# Altium PCB PN532_final.PcbDoc
Units mm, origin at the board's own origin, x right, y up, seen from the top; angles counter-clockwise.
Board outline 117.09 x 51.05 mm, 2 copper layers (Top Layer, Bottom Layer), stack 0.57 mm thick; 54 components, 32 nets, 161 pads, 129 vias.
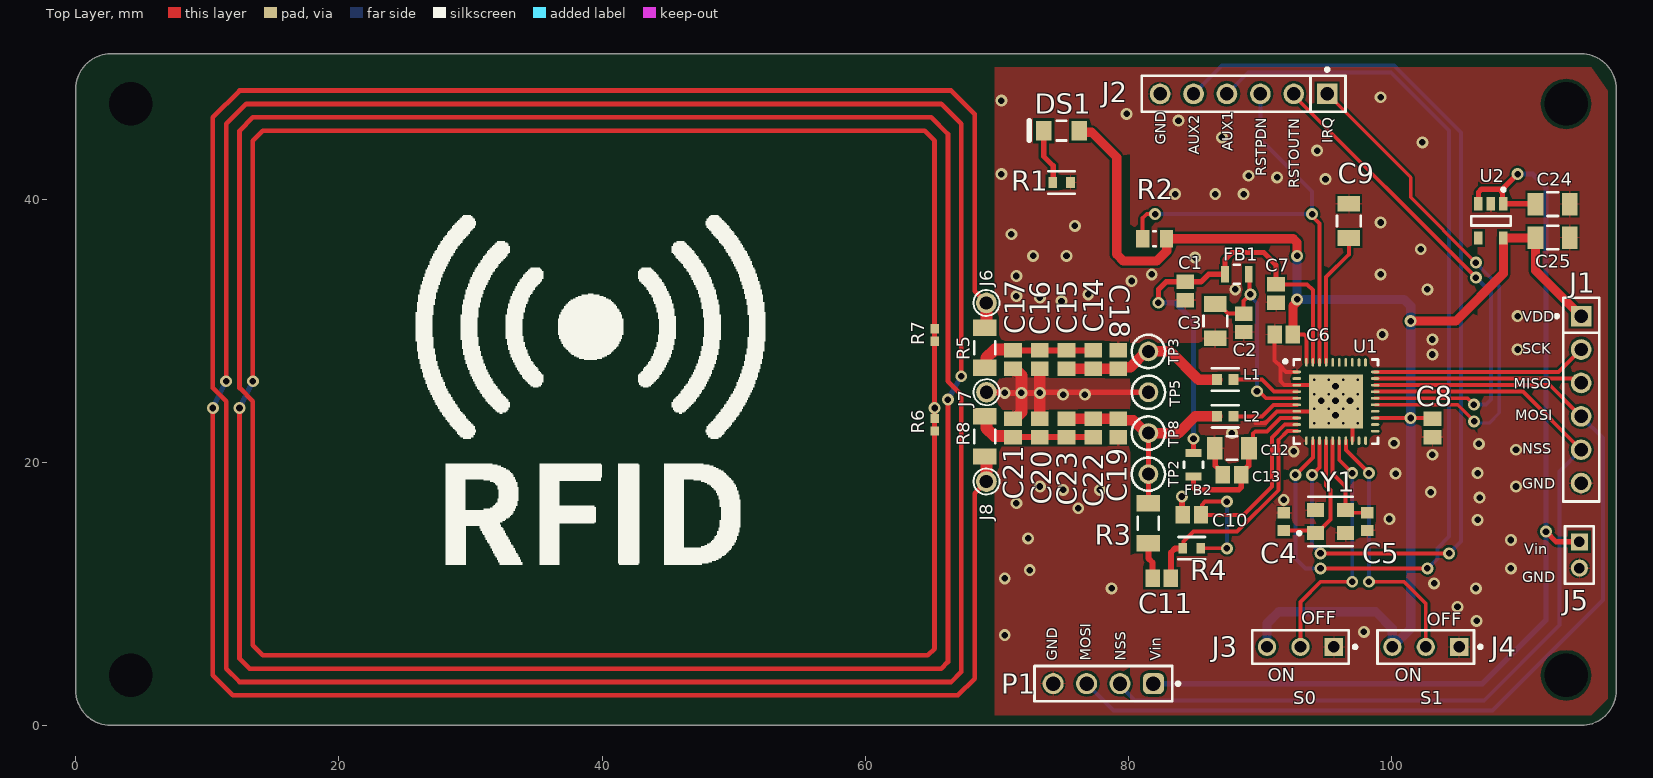
[diagram p0: Top Layer view]
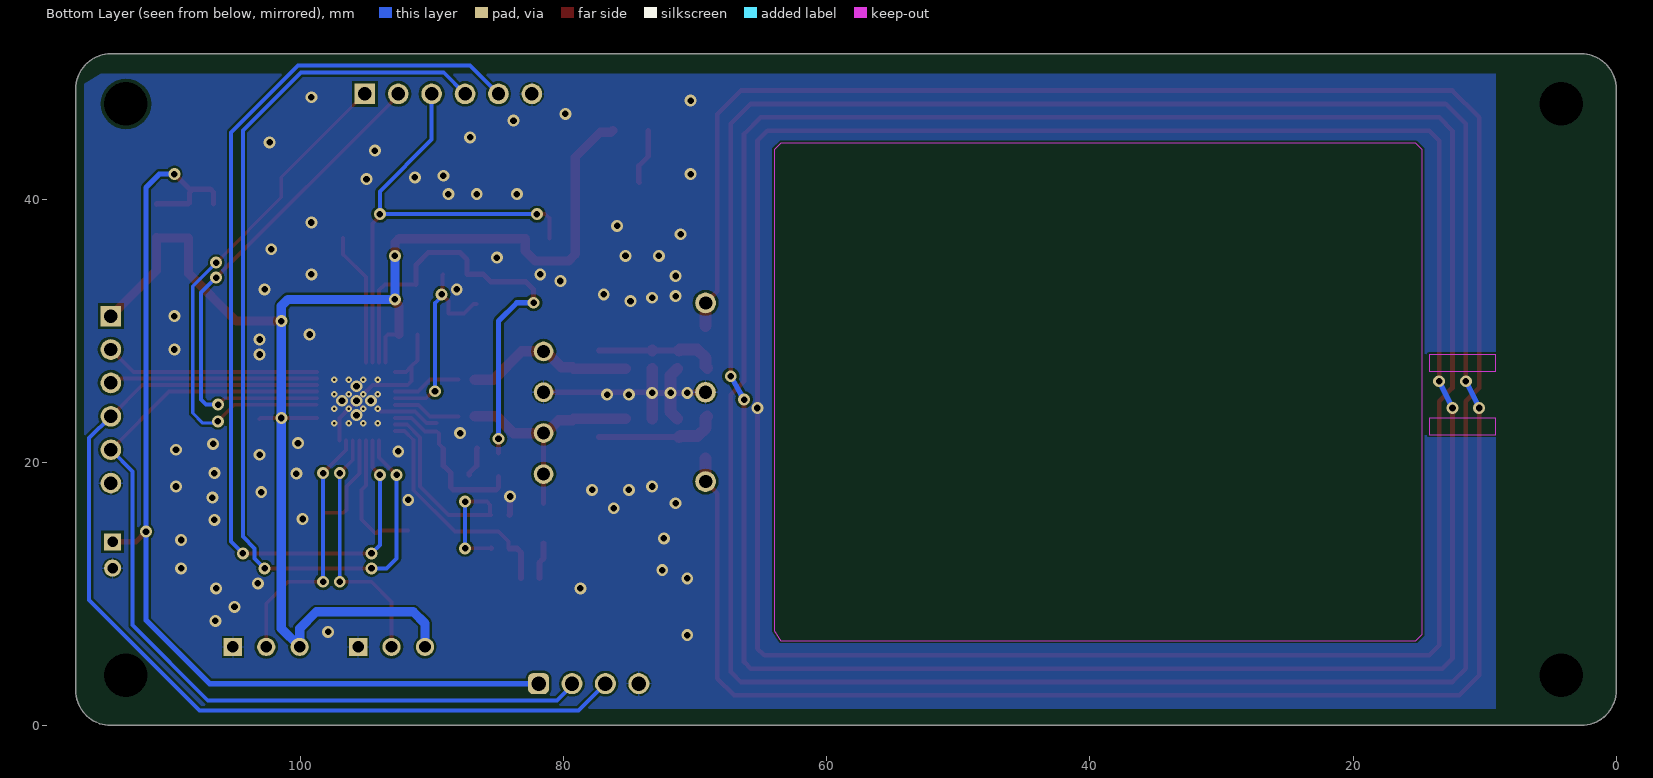
[diagram p1: Bottom Layer view, seen from below]

## Layer stack, top to bottom
Top Solder: solder mask 0.0127, Solder Resist, Dk 3.8
Top Layer: signal copper 0.035
Dielectric: core 0.5, FR-4, Dk 4.5
Bottom Layer: signal copper 0.035
Bottom Solder: solder mask 0.0127, Solder Resist, Dk 3.8

## Board outline
0,4.191 0,47.498 0,48.387 cw(c2.667,48.387) 2.667,51.054 3.556,51.054 114.427,51.054 cw(c114.427,48.387) 117.094,48.387 117.094,2.667 cw(c114.427,2.667) 114.427,0 2.667,0 cw(c2.667,2.667) 0,2.667

## Design rules (kind name [scope] priority, off if disabled: settings)
BoardOutlineClearance [All] p1: gap=0.2 ignorepadtopadclearanceinfootprint=FALSE
Clearance [All] p1: gap=0.19 ignorepadtopadclearanceinfootprint=TRUE except(0.25: Arc-Hole Track-Hole SMDPad-Hole THPad-Hole Via-Hole Fill-Hole Poly-Hole Region-Hole Text-Hole)
ComponentClearance [All] p1: gap=0.127 collisioncheckmode=3 verticalgap=0.127 showdistances=TRUE
DiffPairsRouting [All] p1: maxlimit=0.254 minlimit=0.127 mostfreqgap=0.127 toplayer_minwidth=0.127 toplayer_maxwidth=25.4 toplayer_prefwidth=0.127 bottomlayer_minwidth=0.127 bottomlayer_maxwidth=25.4 bottomlayer_prefwidth=0.127 maxuncoupledlength=12.7
Height [All] p1: minheight=0 maxheight=1816.048 prefheight=12.7
HoleSize [All] p1: absolutevalues=TRUE maxlimit=6.3 minlimit=0.3 maxpercent=80.000 minpercent=20.000
HoleToHoleClearance [All] p1: gap=0.25 allowstackedmicrovias=FALSE
MinimumAnnularRing [All] p1: minimumring=0.076
MinimumSolderMaskSliver [All] p1: minsoldermaskwidth=0
PlaneClearance [All] p1: clearance=0.127
PlaneConnect PlaneConnectPowerPads [InPadClass('PowerPads')] p1: planeconnectstyle=Direct reliefexpansion=0.508 reliefentries=4 reliefconductorwidth=0.254 reliefairgap=0.254
PlaneConnect [All] p2: pad.planeconnectstyle=Relief pad.reliefexpansion=0.3 pad.reliefentries=4 pad.reliefconductorwidth=0.127 pad.reliefairgap=0.127 via.planeconnectstyle=Direct via.reliefexpansion=0.3 via.reliefentries=4 via.reliefconductorwidth=0.127 via.reliefairgap=0.127
PolygonConnect PolygonConnectPowerPads [All vs (InPadClass('PowerPads'))] p1: connectstyle=Direct reliefconductorwidth=0.254 reliefentries=4 polygonreliefangle="90 Angle" airgapwidth=0.254
PolygonConnect [All] p2: thpad.connectstyle=Relief thpad.reliefconductorwidth=0.127 thpad.reliefentries=4 thpad.polygonreliefangle="90 Angle" thpad.airgapwidth=0.127 smdpad.connectstyle=Relief smdpad.reliefconductorwidth=0.127 smdpad.reliefentries=4 smdpad.polygonreliefangle="90 Angle" smdpad.airgapwidth=0.127 via.connectstyle=Direct via.reliefconductorwidth=0.127 via.reliefentries=4 via.polygonreliefangle="90 Angle" via.airgapwidth=0.127
RoutingVias [All] p1: holewidth=0.3 width=0.6 viastyle="Through Hole" minholewidth=0.3 minwidth=0.6 maxholewidth=0.6 maxwidth=6.6
SilkToSilkClearance [All] p1: silktosilkclearance=0
SilkToSolderMaskClearance [IsPad] p1: minsilkscreentomaskgap=0.127 clearancetoexposedcopper=TRUE
SolderMaskExpansion [All] p1: expansion=0.075 istentingtop=FALSE
SupplyNets "Schematic Supply Nets_2" [InNet('VDD')] p1: voltage=0.000
SupplyNets "Schematic Supply Nets_1" [InNet('Vin')] p2: voltage=0.000
SupplyNets "Schematic Supply Nets" [InNet('GND')] p3: voltage=0.000
UnRoutedNet [All] p1: checkbadconnections=TRUE
Width [All] p1: maxlimit=25.4 minlimit=0.127 preferedwidth=0.127 minimp=50.000000 maximp=50.000000 favimp=50.000000
19 further rules are at their usual default settings.

## Classes and differential pairs
component class U_Reader: C1 C2 C3 C4 C5 C6 C7 C8 C9 C10 C11 C12 C13 DS1 FB1 FB2 J1 J2 J3 J4 L1 L2 P1 R1 R2 R3 R4 TP2 U1 Y1
component class U_power: C24 C25 J5 U2
component class U_Antenna: C14 C15 C16 C17 C18 C19 C20 C21 C22 C23 J6 J7 J8 R5 R6 R7 R8 TP3 TP5 TP8

## Components (designator, comment, footprint, x,y, rotation, side; value= is the part's Value field where it differs from the comment)
C1 "0.1uF" CAPC2013X140X50LL20T25 84.332,33.02 r90 top
C2 "0.1uF" CAPC2013X140X50LL20T25 88.777,30.607 r90 top
C3 "10uF" FP-CC1206-0_3-1_45-IPC_C 86.618,30.734 r270 top
C4 "33pF" CAPC1608X90X35NL10T15 91.837,15.49 r270 top
C5 "33pF" CAPC1608X90X35NL10T15 98.187,15.49 r90 top
C6 "0.1uF" CAPC2013X140X50LL20T25 91.821,29.718 r0 top
C7 "0.1uF" CAPC2013X140X50LL20T25 91.242,32.837 r90 top
C8 "0.1uF" CAPC2013X140X50LL20T25 103.124,22.606 r90 top
C9 "10uF" FP-CC1206-0_3-1_45-IPC_C 96.774,38.354 r90 top
C10 "0.1uF" CAPC2013X140X50LL20T25 84.832,16.006 r0 top
C11 "1nF" CAPC2013X140X50LL20T25 82.55,11.192 r0 top
C12 "10uF" FP-CC1206-0_3-1_45-IPC_C 87.884,21.082 r180 top
C13 "0.1uF" CAPC2013X140X50LL20T25 87.884,19.05 r0 top
C14 "NC" CAPC2013X140X50LL20T25 77.335,27.813 r90 top
C15 "22pF" CAPC2013X140X50LL20T25 75.307,27.813 r90 top
C16 "100pF" CAPC2013X140X50LL20T25 73.279,27.813 r90 top
C17 "NC" CAPC2013X140X50LL20T25 71.251,27.809 r90 top
C18 "220pF" CAPC2013X140X50LL20T25 79.24,27.809 r270 top
C19 "220pF" CAPC2013X140X50LL20T25 79.24,22.61 r270 top
C20 "100pF" CAPC2013X140X50LL20T25 73.279,22.61 r90 top
C21 "NC" CAPC2013X140X50LL20T25 71.251,22.61 r90 top
C22 "NC" CAPC2013X140X50LL20T25 77.335,22.61 r90 top
C23 "22pF" CAPC2013X140X50LL20T25 75.307,22.61 r90 top
C24 "10uF" FP-CC1206-0_3-1_45-IPC_C 112.268,39.624 r0 top
C25 "10uF" FP-CC1206-0_3-1_45-IPC_C 112.268,37.084 r0 top
DS1 "SML-LX1206YC-TR" LUMX-SML-LX1206YC-TR_V 74.93,45.212 r180 top
FB1 "Ferrite" FP-BLM21-0_2-t0_85-e0_5-MFG 88.265,34.29 r0 top
FB2 "Ferrite" FP-BLM21-0_2-t0_85-e0_5-MFG 84.963,19.812 r270 top
J1 "22-28-4060" FP-22-28-4060-MFG 114.427,24.765 r270 top
J2 "22-28-4060" FP-22-28-4060-MFG 88.773,48.006 r180 top
J3 "87224-3" FP-87224-3-MFG 93.091,5.969 r180 top
J4 "87224-3" FP-87224-3-MFG 102.616,5.969 r180 top
J5 "M22-2510205" FP-M22-2510205-MFG 114.3,12.954 r270 top
J6 "TX1_PRE" FP-5000-MFG 69.223,32.113 r0 top
J7 "TGND" FP-5000-MFG 69.227,25.327 r0 top
J8 "TX2_PRE" FP-5000-MFG 69.223,18.541 r0 top
L1 "560nH" FP-LQM18FN_00-IPC_C 87.376,26.289 r180 top
L2 "560nH" FP-LQM18FN_00-IPC_C 87.376,23.495 r180 top
P1 "61300411121" 61300411121 78.105,3.175 r180 top
R1 "10Ohm" FP-RC0603-0_55-IPC_C 74.93,41.275 r180 top
R2 "10kOhm" RESC2013X60X35NL10T20 82,37 r0 top
R3 "1.69kOhm" RESC3116X65X40ML10T20 81.534,15.371 r90 top
R4 "1kOhm" FP-RC0603-0_55-IPC_C 84.832,13.474 r0 top
R5 "1.5Ohm" RESC3116X65X40ML10T20 69.096,28.706 r270 top
R6 "NC" RESC1005X40X25ML05T10 65.278,22.855 r270 top
R7 "NC" RESC1005X40X25ML05T10 65.278,29.674 r270 top
R8 "1.5Ohm" RESC3116X65X40ML10T20 69.096,21.967 r270 top
TP2 "RX" KSTN-5003 81.534,19.1 r0 top
TP3 "TX1_post" KSTN-5003 81.534,28.43 r0 top
TP5 "TGND" KSTN-5003 81.534,25.327 r0 top
TP8 "TX2_post" KSTN-5003 81.534,22.224 r0 top
U1 "PN5321A3HN/C106;55" NXP-HVQFN-40_L 95.79,24.62 r0 top
U2 "MIC5225-3.3YM5-TR" FP-SOT23-5LD-PL-1-MFG 107.569,38.354 r270 top
Y1 "27.12MHz" FP-ABM8-MFG 95.377,15.494 r0 top

## Footprints (in the part's own frame and the unit in brackets; to place one, negate y for a bottom-side part, rotate by r counter-clockwise, add the part's x,y. Pads: shape width x height; smd on the part's side, far side on the other; paste and mask are expansions set on the pad)
61300411121 [mm] "Pin Header, pitch 2.54 mm, THT, Vertical, single row, 4p"
  rrect50% 1.6x1.6 hole 1.1: 1(-3.81,0)
  round 1.6 hole 1.1: 2(-1.27,0) 3(1.27,0) 4(3.81,0)
  silkscreen extent -5.8,-1.35 5.23,1.35, body extent -5.08,-1.27 5.08,1.27, height 8.57
CAPC1608X90X35NL10T15 [mm] "Chip Capacitor, 2-Leads, Body 1.60x0.80mm, IPC Medium Density"
  rect 0.85x0.95 smd: 1(-0.675,0) 2(0.675,0)
  body extent -0.85,-0.45 0.85,0.45, height 0.9
CAPC2013X140X50LL20T25 [mm] "Chip Capacitor, 2-Leads, Body 2.00x1.25mm, IPC High Density"
  rect 1.1x1.35 smd: 1(-0.7,0) 2(0.7,0)
  body extent -1.1,-0.72 1.1,0.72, height 1.4
FP-22-28-4060-MFG [mm]
  rect 1.57x1.57 hole 1.02 paste-2539.97 mask+0: 1(-6.35,0)
  round 1.57 hole 1.02 paste-2539.97 mask+0: 2(-3.81,0) 3(-1.27,0) 4(1.27,0) 5(3.81,0) 6(6.35,0)
  silkscreen extent -7.75,-1.97 7.75,1.37, body extent -7.85,-1.47 7.85,1.47, height 0.25
FP-5000-MFG [mm]
  round 1.57 hole 1.02 paste-2539.97 mask+0: 1(0,0)
  silkscreen extent -0.99,-0.99 0.99,0.99, body extent -1.45,-1.45 1.45,1.45, height 0.25
FP-87224-3-MFG [mil]
  rect 54.69x54.69 hole 35 paste-99999 mask+0: 1(-100,0)
  round 54.69 hole 35 paste-99999 mask+0: 2(0,0) 3(100,0)
  silkscreen extent -168,-50 145,50, body extent -148,-54 148,54, height 10
FP-ABM8-MFG [mm]
  rect 1.3x1.05 smd paste+0 mask+0: 1(-1.15,-0.875) 2(1.15,-0.875) 3(1.15,0.875) 4(-1.15,0.875)
  silkscreen extent -2.5,-1.88 1.7,1.88, body extent -1.9,-1.5 1.9,1.5, height 0.25
FP-BLM21-0_2-t0_85-e0_5-MFG [mm]
  rect 0.6x1.25 smd paste+0 mask+0: 1(-0.9,0) 2(0.9,0)
  silkscreen extent -0.23,-0.72 0.23,0.72, body extent -1.3,-0.82 1.3,0.82, height 0.25
FP-CC1206-0_3-1_45-IPC_C [mm]
  rect 1.203x1.706 smd paste+0 mask+0: 1(-1.3,0) 2(1.3,0)
  silkscreen extent -0.4,-0.9 0.4,0.9, body extent -2,-1 2,1, height 0.25
FP-LQM18FN_00-IPC_C [mm]
  rect 0.758x0.812 smd paste+0 mask+0: 1(-0.627,0) 2(0.627,0)
  silkscreen extent -1.01,-0.85 1.01,0.85, body extent -1.11,-0.55 1.11,0.55, height 0.25
FP-M22-2510205-MFG [mm]
  rect 1.3x1.3 hole 0.8 paste-2539.97 mask+0: 1(-1,0)
  round 1.3 hole 0.8 paste-2539.97 mask+0: 2(1,0)
  silkscreen extent -2.17,-1.1 2.17,1.1, body extent -2.27,-1.2 2.27,1.2, height 0.25
FP-RC0603-0_55-IPC_C [mm]
  rect 0.659x0.812 smd paste+0 mask+0: 1(-0.677,0) 2(0.677,0)
  silkscreen extent -1.01,-0.85 1.01,0.85, body extent -1.11,-0.55 1.11,0.55, height 0.25
FP-SOT23-5LD-PL-1-MFG [mm]
  rect 1x0.66 smd paste+0 mask+0: 1(-1.3,0.95) 2(-1.3,0) 3(-1.3,-0.95) 4(1.3,-0.95) 5(1.3,0.95)
  silkscreen extent -2.5,-1.5 0.35,1.5, body extent -1.9,-1.6 1.9,1.6, height 0.25
KSTN-5003 [mm] "Test Point, Through Hole, Dia 2.54mm"
  round 1.5 hole 1: 1(0,0)
  silkscreen extent -1.27,-1.27 1.27,1.27, body extent -1.27,-1.27 1.27,1.27, height 4.57
LUMX-SML-LX1206YC-TR_V [mm] "SMD, 2-Leads, Body 3.2x1.5mm"
  rect 1.2x1.5 smd: 1(-1.35,0) 2(1.35,0)
  silkscreen extent -0.35,-0.75 2.45,0.75, body extent -1.6,-0.75 1.6,0.75, height 1.25
NXP-HVQFN-40_L [mm] "QFN, 40-Leads, Body 6.1x6.1mm, Pitch 0.5mm, Thermal Pad 4.1x4.1mm, IPC High Density"
  oval 0.65x0.2 smd: 1(-2.975,2.25) 2(-2.975,1.75) 3(-2.975,1.25) 4(-2.975,0.75) 5(-2.975,0.25) 6(-2.975,-0.25) 7(-2.975,-0.75) 8(-2.975,-1.25) 9(-2.975,-1.75) 10(-2.975,-2.25) 21(2.975,-2.25) 22(2.975,-1.75) 23(2.975,-1.25) 24(2.975,-0.75) 25(2.975,-0.25) 26(2.975,0.25) 27(2.975,0.75) 28(2.975,1.25) 29(2.975,1.75) 30(2.975,2.25)
  oval 0.2x0.65 smd: 11(-2.25,-2.975) 12(-1.75,-2.975) 13(-1.25,-2.975) 14(-0.75,-2.975) 15(-0.25,-2.975) 16(0.25,-2.975) 17(0.75,-2.975) 18(1.25,-2.975) 19(1.75,-2.975) 20(2.25,-2.975) 31(2.25,2.975) 32(1.75,2.975) 33(1.25,2.975) 34(0.75,2.975) 35(0.25,2.975) 36(-0.25,2.975) 37(-0.75,2.975) 38(-1.25,2.975) 39(-1.75,2.975) 40(-2.25,2.975)
  rect 4.1x4.1 smd: 41(0,0)
  silkscreen extent -3.97,-3.2 3.2,3.2, body extent -3.05,-3.05 3.05,3.05, height 1
RESC1005X40X25ML05T10 [mm] "Chip Resistor, 2-Leads, Body 1.00x0.50mm, IPC Low Density"
  rect 0.7x0.65 smd: 1(-0.475,0) 2(0.475,0)
  body extent -0.53,-0.27 0.53,0.28, height 0.4
RESC2013X60X35NL10T20 [mm] "Chip Resistor, 2-Leads, Body 2.1x1.35mm, IPC Medium Density"
  rect 1x1.35 smd: 1(-0.9,0) 2(0.9,0)
  silkscreen extent -0.1,-0.58 0.1,0.58, body extent -1.05,-0.68 1.05,0.67, height 0.6
RESC3116X65X40ML10T20 [mm] "Chip Resistor, 2-Leads, Body 3.10x1.60mm, IPC Low Density"
  rect 1.25x1.8 smd: 1(-1.525,0) 2(1.525,0)
  silkscreen extent -0.5,-0.8 0.5,0.8, body extent -1.6,-0.85 1.6,0.85, height 0.65

## Part data
C1 C2 C6 C7 C8 C10 C11 C13 C16: library part CMP-2007-04699-1, "08055C221KAT2A / 0805", Manufacturer="AVX Interconnect / Elco", Part Number=08055C221KAT2A
C3 C9 C12 C24 C25: library part CMP-2000-05436-2, "CAP CER 1000PF 2KV X7R 1206", Capacitance=1nF, Case Code (Imperial)=1206, Case Code (Metric)=3216, Dielectric=X7R, Insulation Resistance=10GR, Max Operating Temperature=125°C, Min Operating Temperature=-55°C, Package Quantity=1, Resistor Type=Ceramic, Tolerance=10%, Voltage=2kV, Case/Package=1206, Construction=Flat, Depth=1.6mm, Dissipation Factor=2.5%, Height=1.25mm, Lead Free="Lead Free", Length=3.2mm, Mount="Surface Mount", Number of Pins=2, Packaging="Tape and Reel", Radiation Hardening=No, RoHS Compliant=Yes, Series=CC, Termination=SMD/SMT, Thickness=0.057inch, Voltage Rating=2kV, Voltage Rating (DC)=2kV, Width=0.063inch
C4 C5: library part CMP-2006-02655-1, "0603", Manufacturer=Murata, Part Number=GRM1885C1H330GA01D
C14 C15 C17 C18 C19 C20 C21 C22 C23: library part CMP-2007-04699-1, "08055C221KAT2A", Manufacturer="AVX Interconnect / Elco", Part Number=08055C221KAT2A
DS1: library part CMP-2000-07124-1, "Yellow LED, Water Clear Len, 585 nm, 2.1 V, -40 to 85 degC, 2-Pin SMD, RoHS, Tape and Reel", Color=Yellow, Current - Test=20mA, Lens Color=Colorless, Manufacturer=Lumex, Millicandela Rating=6mcd, Package / Case=1206(3216Metric), Package Description="2-Pin Surface Mount Device, Body 3.2 x 1.5 mm", Standard Package=3,000, Supplier Device Package=1206, Voltage - Forward (Vf) (Typ)=2.1V, Catalog Drawings=SML-LX1206SeriesTopSML-LX1206SeriesSideSML-LX1206SeriesBottomSML-LX1206SeriesFootprint, Category=Optoelectronics, Datasheet URL=http://www.lumex.com/content/files/ProductAttachment/SML-LX1206YC-TR.pdf, Datasheet Version="Rev. K, 08/2012", Family=LEDIndication-Discrete, Features=-, Height (Max)=1.10mm, Lens Style/Size=RectanglewithFlatTop, Lens Transparency=Clear, Manufacturer URL=http://www.lumexinstruments.com/, Mounting Technology=SurfaceMount, Mounting Type=SurfaceMount, Online Catalog=SML-LX1206RectanglewithFlatTop1206PackageLEDs, Other Names=67-1358-2LU60357TRSMLLX1206YCTR, Package Reference=SML-LX1206YC-TR, Packaging=Tape&Reel(TR), Product Training Modules=LEDsBenefitsofCustomLEDandLCDTechnology, RoHS Information=RoHSCertofCompliance, Series=-, Size / Dimension=3.20mmLx1.60mmW, Viewing Angle=160°, Wavelength - Dominant=-, Wavelength - Peak=585nm
FB1 FB2: library part CMP-0686-00645-3, "Chip Ferrite Bead, 0805, 470Ω @ 100MHz, 0.18Ω, 25%, 700mA / BLM21AG471SN1D", Case Code (Imperial)=0805, Case Code (Metric)=2012, Current Rating=700mA, DC Current=200mA, DC Resistance (DCR)=190mR, DC Resistance-Max=190MR, Frequency=100MHz, Max Operating Temperature=125°C, Min Operating Temperature=-55°C, Package Quantity=1, Tolerance=25%, Case/Package=0805, Core Material=Ferrite, Depth=1.45mm, Height=0.85mm, Impedance=470R, Lead Free="Lead Free", Length=2mm, Material=Steel, Max Current Rating=700mA, Max DC Current=200mA, Number of Circuits=1, Number of Lines=1, Number of Pins=2, Packaging="Tape and Reel", Radiation Hardening=No, REACH SVHC="No SVHC", RoHS Compliant=Yes, Series=BLM21A, Shielding=Unshielded, Termination=SMD/SMT, Test Frequency=100MHz, Width=1.25mm
J1 J2: library part CMP-04776-000763-1, "CONN HEADER VERT 6POS 2.54MM", Color=Black, Contact Resistance=20mR, Current Rating=4A, Max Operating Temperature=75°C, Max Voltage Rating (AC)=250V, Max Voltage Rating (DC)=250.25kV, Min Operating Temperature=0°C, Package Quantity=1, Connector Type="Male Pin", Contact Material=Brass, Contact Mating Length=0.24inch, Contact Plating=Tin, Contact Type="Male Pin", Depth=2.49mm, Gender=Male, Housing Color=Black, Housing Material=Thermoplastic, Length=15.24mm, Mount="Through Hole", Number of Contacts=6, Number of Positions=6, Number of Rows=1, Orientation=Straight, Packaging=Bulk, Pitch=2.54mm, RoHS Compliant=Yes, Series="KK® 42375", Termination=Solder, Voltage Rating=250V
J3 J4: library part CMP-2000-05697-2, "CONN HEADER VERT 3POS 2.54MM", Color=Black, Contact Current Rating=3A, Flammability Rating="UL94 V-0", High Temperature Housing=No, Max Operating Temperature=105°C, Min Operating Temperature=-65°C, Package Quantity=520, Approvals=CSA, Board Standoff="No (Without)", Connector Type=Plug, Contact Gender=Male, Contact Material=Bronze, Contact Mating Length=8.08mm, Contact Plating=Gold, Contact Post Length=0.125inch, Contact Protection="No (Without)", Contact Shape=Square, Contact Type="Male Pin", Current Rating=3A, Depth=2.54mm, ELV=Compliant, Gasket="No (Without)", High Speed Serial Data Connector=No, Housing Color=Black, Housing Material=Thermoplastic, Keyed=No, Lead Free="Lead Free", Length=7.21mm, Mating Alignment="No (Without)", Mating Connector Lock="No (Without)", Mount="Through Hole", Number of Contacts=3, Number of Positions=3, Number of Rows=1, Orientation=Straight, Packaging=Carton, PCB Mount Retention=Without, PCB Mounting Orientation=Vertical, PCB Thickness=1.397mm, Pitch=2.54mm, Radiation Hardening=No, RoHS Compliant=Yes, Row Spacing=2.54mm, Selectively Loaded="No (Without)", Series="AMPMODU MOD II", Stabilizers="No (Without)", Strain Relief="No (Without)", Termination="Through Hole"
J5: library part CMP-15831-000005-1, "CONN HEADER VERT 2POS 2MM", Current Rating=2A, Manufacturer=Harwin, Package=0, Temperature="-40°C to +105°C", Temperature Range High=+105°C, Temperature Range Low=-40°C, Automotive=No, Category=Conn, ComponentLink2Description=Datasheet, ComponentLink2URL=https://cdn.harwin.com/pdfs/C018XX_M22_Series_Connectors.pdf, Conn Gender=Male, Conn Orientation=Vertical, Contact Material=Gold,Nickel, Device Class L1=Connectors, Device Class L2="Headers and Wire Housings", Device Class L3=unset, Digikey Description="CONN HEADER VERT 2POS 2MM", Footprint Url=https://cdn.harwin.com/pdfs/M22-251.pdf, Height=5.45mm, Lead Free=Yes, Manufacturer Part Number=M22-2510205, Mouser Description="Headers & Wire Housings 2 PIN SIL VERTICAL GOLD PIN HEADER", Number of Contacts=2, Number of Rows=1, Octopart=https://octopart.com/m22-2510205-harwin-2538221, Pitch=2mm, RoHS=TRUE
J6 J7 J8: library part CMP-19636-000027-1, "PC TEST POINT MINIATURE RED", Color=Red, Flammability Rating="UL94 V-0", Package Quantity=100, Body Material=Bronze, Contact Material=Bronze, Contact Plating=Tin, Height=0.3inch, Hole Diameter=1.6mm, Housing Color=Red, Inside Diameter=1.27mm, Insulation=Insulated, Lead Free="Lead Free", Length=7.62mm, Material=Nylon, Mount=PCB, Number of Contacts=1, Number of Ports=1, Orientation=Straight, Outside Diameter=2.54mm, Packaging=Bulk, Plating=Silver, REACH SVHC="No SVHC", RoHS Compliant=Yes, Series=THM
L1 L2: library part CMP-06042-016407-1, "FIXED IND 10UH 50MA 900 MOHM SMD", Case Code (Imperial)=0603, Case Code (Metric)=1608, Current Rating=50mA, DC Resistance (DCR)=1.17R, Inductance=10uH, Max Operating Temperature=125°C, Min Operating Temperature=-55°C, Package Quantity=4000, Self Resonant Frequency=30MHz, Test Frequency=1MHz, Tolerance=20%, Case/Package=0603, Core Material=Ferrite, DC Current=50mA, Depth=0.9mm, Height=0.9mm, Height - Seated (Max)=0.035inch, Lead Free="Lead Free", Length=0.063inch, Max DC Current=50mA, Military Standard=Not, Mount="Surface Mount", Packaging="Tape and Reel", Radiation Hardening=No, RoHS Compliant=Yes, Saturation Current=50mA, Series=LQM18F, Shielding=Shielded, Termination=SMD/SMT, Width=0.031inch
P1: library part CMP-1502-01064-3, Color=Black, Contact Resistance=20mΩ, Current Rating=3A, Max Operating Temperature=105°C, Min Operating Temperature=-40°C, Operating Supply Voltage=250V, Connector Type="Male Pin", Contact Material=Copper, Contact Mating Length=5.9944mm, Contact Plating=Gold, Gender=Male, Height=8.89mm, Lead Free="Lead Free", Lead Pitch=2.54mm, Mount="Through Hole", NexarPartId=32855522, Number of Contacts=4, Number of Pins=4, Number of Positions=4, Number of Rows=1, Orientation=Vertical, Packaging=Bulk, Pitch=2.54mm, REACH SVHC=Unknown, RoHS=Compliant, Termination=Solder, Voltage Rating=250V
R1 R4: library part CMP-2100-03664-2, "RES 10K OHM 1% 1/10W 0603", Case Code (Imperial)=0603, Case Code (Metric)=1608, Max Operating Temperature=155°C, Max Power Dissipation=100mW, Min Operating Temperature=-55°C, Resistance=10kR, Resistance Tolerance=1%, Resistor Type="Thick Film", Temperature Coefficient=100ppm/°C, Voltage Rating=75V, Voltage Rating (DC)=50V, Case/Package=0603, Construction=Rectangular, Depth=0.8mm, Features="Moisture Resistant", Height=0.45mm, Lead Free="Lead Free", Lead Pitch=0.3mm, Length=1.6mm, Military Standard=Not, Number of Pins=2, Number of Terminations=2, Packaging="Tape and Reel", Power Rating=100mW, RoHS Compliant=Yes, Series=RC, Size Code=0603, Termination=SMD/SMT, Tolerance=1%, Weight=7.1E-05oz, Width=0.8mm
R2: library part CMP-1659-00013-4, "Chip Resistor, 10 KOhm, +/- 1%, 0.125 W, -55 to 155 degC, 0805 (2012 Metric), RoHS, Tape and Reel", Manufacturer=Yageo, Max Operating Temperature="155 degC", Min Operating Temperature="-55 degC", Package Quantity=5000, Voltage Rating="150 V", ComponentLink1Description="Manufacturer URL", ComponentLink1URL=http://www.yageo.com/, ComponentLink2Description=Datasheet, ComponentLink2URL=http://www.yageo.com/documents/recent/PYu-RC_Group_51_RoHS_L_04.pdf, DatasheetVersion="Rev. 4, 02/2016", Height="0.5 mm", Length="2 mm", Mount="Surface Mount", Mounting Technology="Surface Mount", PackageDescription="2-Pin Surface Mounted Device, Body 2 x 1.25 mm", PackageReference=0805, Packaging="Tape and Reel", Pins=2, REACH SVHC="No SVHC", RoHSCompliant=true
R3 R5 R8: library part CMP-2100-03677-1, "Chip Resistor, 10 Ohm, +/- 1%, 0.25 W, -55 to 155 degC, 1206 (3216 Metric), RoHS, Tape and Reel", Case Code (Imperial)=1206, Case Code (Metric)=3216, Manufacturer=Yageo, Max Operating Temperature=155degC, Max Power Dissipation=250mW, Min Operating Temperature=-55degC, Package Description="2-Pin Surface Mount Device, Body 3.1 x 1.6 mm", Package Quantity=1, Package Reference=1206.0, Resistance=10Ohm, Temperature Coefficient=200ppm/degreesC, Tolerance=1%, Voltage Rating=200V, Case/Package=1206, Composition=ThickFilm, Datasheet URL=http://www.yageo.com/NewPortal/yageodocoutput?fileName=/pdf/R-Chip/PYu-RC_Group_51_RoHS_L_5.pdf, Datasheet Version="Rev. 5, 10/2016", Depth=1.6mm, Height=0.026inch, Lead Free=LeadFree, Length=3.1mm, Manufacturer URL=http://www.yageo.com/, Military Standard=Not, Number of Pins=2, Number of Terminations=2, Packaging=TapeandReel, Power Rating=250mW, REACH SVHC=Unknown, RoHSCompliant=true, Termination=SMD/SMT, Voltage Rating (DC)=200V, Width=0.063inch
R6 R7: library part CMP-2002-07344-1, Manufacturer="Yageo / Phycomp", Part Number=RC0402FR-07100RL
TP2 TP3 TP5 TP8: library part CMP-1672-00009-1, "Test Point, Orange, 1-Pin THD, RoHS", Forward Current="3 A", Forward Voltage="1.08 V", Max Operating Temperature="150 degC", Max Surge Current="80 A", Min Operating Temperature="-65 degC", Package Quantity=500, Peak Reverse Current="600 uA", ComponentLink1Description="Manufacturer URL", ComponentLink1URL=http://www.keyelco.com/, ComponentLink2Description=Datasheet, ComponentLink2URL=http://keyelco.com/userAssets/file/M65p56.pdf, DatasheetVersion=Jun-15, Diameter="5.3 mm", Height="0.25 inch", Length="9.5 mm", Mount="Through Hole", PackageDescription="1-Pin Through Hole Device, Dia 2.54 mm", PackageReference=5003, Packaging=Bulk, Pins=2, Radiation Hardening=No, REACH SVHC="No SVHC", RoHSCompliant=true, Weight="0.01 lb", Width="0.25 inch"
U1: library part CMP-2000-05282-1, "NFC Controller, 13.56 MHz, -30 to 85 degC, 40-Pin HVQFN (SOT618-1), RoHS, Tray", Manufacturer="NXP Semiconductors", Maximum Operating Temperature=+85C, Minimum Operating Temperature=-25C, Operating Frequency=13.56MHz, Package / Case=QFN-40, Supply Current=12uA, Supply Voltage - Max=5.5V, Supply Voltage - Min=2.7V, Brand=NXPSemiconductors, Datasheet URL=https://datasheet.ciiva.com/1172/1391932-1172875.pdf, Datasheet Version="Rev. 1.2, 03/2011", Factory Pack Quantity=490, Manufacturer URL=http://www.nxp.com/, Mounting Style=SMD/SMT, Packaging=Tray, Product Category=RFWirelessMisc, RoHS=Details, Type=NearFieldTransmissionModule,Read/Write
U2: library part CMP-06324-000013-1, "IC REG LINEAR 3.3V 150MA SOT23-5", Dropout Voltage=310mV, Manufacturer="Microchip Technology", Max Junction Temp=+125°C, Max Supply Voltage=16V, Min Supply Voltage=2.3V, Nominal Supply Current=29-3000uA, Output Current=150mA, Output Voltage=3.3V, Package=SOT23-5LD-PL-1, Temperature="-40°C to +125°C", Temperature Range Low=-40°C, Accuracy Percentage=1%, Automotive=No, Category=IC, ComponentLink2Description=Datasheet, ComponentLink2URL=http://ww1.microchip.com/downloads/en/DeviceDoc/mic5225.pdf, Device Class L1="Integrated Circuits (ICs)", Device Class L2="Power Management ICs", Device Class L3="Voltage Regulators - Linear", Digikey Description="IC REG LINEAR 3.3V 150MA SOT23-5", Height=1.45mm, Lead Free=Yes, Manufacturer Part Number=MIC5225-3.3YM5-TR, Mouser Description="LDO Voltage Regulators High Vin, Low Iq Regulator (Lead Free)", Number Of Outputs=1, Octopart=https://octopart.com/mic5225-3.3ym5-tr-microchip-66802280, Output Type=Fixed, RoHS=TRUE, Standoff Height=0mm, Temperature Range High=+125°C
Y1: library part CMP-27762-000994-1, "Crystal 27.12MHz ±30ppm 18pF SMD-4 3.2mm x 2.5mm / ABM8-27.120MHZ-B4-T", Capacitance=1.8E-11F, Case/Package=SMD/SMT, ESR (Equivalent Series Resistance)=50R, Frequency Stability=50ppm, Frequency Tolerance=30ppm, Load Capacitance=18pF, Max Operating Temperature=70°C, Min Operating Temperature=-20°C, Frequency=27.12MHz, Height=0.031inch, Lead Free="Lead Free", Length=0.126inch, Mount="Surface Mount", Packaging="Tape and Reel", RoHS Compliant=Yes, Width=0.098inch

## Free pads (board coordinates)
  round 0 hole 3.3 unplated: 4(4.191,3.81) 4(4.191,47.244) 4(113.284,3.81) 4(113.284,47.244)

## Via types
v1: diameter 0.907/0.907 (per signal layer), hole 0.5, Top Layer to Bottom Layer, 113 vias
v2: diameter 0.5, hole 0.2, Top Layer to Bottom Layer, 16 vias

## Nets (pads, with @x,y where several pads share a name; then routed paths per layer and width w, separated by ;. In a path a pad name is that pad's centre, name@x,y a point inside that pad or via, vN(x,y) a via of type N, cw(c..) or ccw(c..) an arc to the next point about the centre after c; other vN are vias at no path point)
AUX1: J2.4 U1.12 | length 73.2
  Top Layer w0.3: v1(92.71,19.05) 94.04,20.38 U1.12 ; v1(94.615,11.938) v1(102.743,11.938)
  Bottom Layer w0.3: J2.4 89.122,49.625 99.979,49.625 104.394,45.21 104.394,14.351 103.505,13.462 103.505,12.7 v1(102.743,11.938) ; v1(92.71,19.05) 92.71,12.7 93.472,11.938 v1(94.615,11.938)
AUX2: J2.5 U1.13 | length 74.5
  Top Layer w0.3: v1(93.98,19.05) 94.54,19.61 U1.13 ; v1(94.615,13.081) v1(104.394,13.081)
  Bottom Layer w0.3: J2.5 87.122,50.165 100.203,50.165 105.283,45.085 105.283,14.224 105.283,13.97 v1(104.394,13.081) ; v1(93.98,19.05) 93.98,13.723 94.615,13.088 v1(94.615,13.081)
AVDD: C12.1 C13.2 FB2.2 U1.8 | length 12.9
  Top Layer w0.3: C13.2 C13.2@88.584,19.175 ; C12.1@89.154,21.052 C12.1 89.486,21.384 89.486,22.176 89.662,22.352 90.551,22.352 91.569,23.37 U1.8
  Top Layer w0.4: FB2.2 84.963,18.083 85.139,17.907 88.392,17.907 88.584,18.099 C13.2 ; C13.2@88.584,19.175 89.154,19.745 C12.1@89.154,21.052
GND: C1.1 C2.1 C3.2 C4.1 C5.1 C6.1 C7.1 C8.1 C9.2 C10.1 C12.2 C13.1 C16.1 C17.1 C18.1 C19.2 C20.2 C21.2 C24.2 C25.2 J1.6 J2.6 J3.1 J4.1 J5.2 J7.1 P1.4 R1.1 R6.1 R7.2 TP5.1 U1.1 U1.3 U1.7 U1.11 U1.18 U1.41 U2.2 Y1.2 Y1.4 | length 51.3
  Top Layer w0.3: 89.662,22.987 90.424,22.987 91.307,23.87 U1.7 U1.41@93.94,23.87 ; C6.1 91.121,27.751 91.562,27.31 ; U1.1 92.002,26.87 91.562,27.31 ; U1.41@94.54,25.87 U1.3 91.859,25.87 91.562,26.167 91.562,27.31 ; v2(95.24,24.07) U1.41 ; U1.18 U1.41@97.04,23.37
  Top Layer w0.356: 65.278,22.38 R6.1 v1(65.278,24.13) R7.2 65.278,30.149 ; U1.41@93.94,23.87 v2(94.14,24.07) ; U1.41@94.54,25.87 v2(95.24,25.17) U1.41 v2(96.34,24.07) U1.41@97.04,23.37
  Top Layer w0.4: C12.2 86.614,21.052 86.614,19.745 87.184,19.175 C13.1
  Top Layer w0.45: J7.1 69.254,25.3 70.585,25.3 v1(70.612,25.273) v1(71.882,25.273) v1(73.279,25.273) ; C21.2 C21.2@71.376,23.31 ; C17.1 C17.1@71.376,27.109 ; v1@73.279,25.327 TP5.1 ; v1(84.074,17.399) 84.103,17.37 84.103,16.035 C10.1
  Top Layer w0.9: C21.2@71.376,23.31 71.882,23.816 v1(71.882,25.273) 71.882,26.603 C17.1@71.376,27.109 ; C20.2 73.279,25.327 C16.1
  other v1: 70.612,6.858 97.917,7.112 106.487,7.953 105.029,9.017 78.74,10.414 106.426,10.414 103.251,10.795 70.612,11.176 72.517,11.811 109.093,11.938 109.093,14.097 72.39,14.224 106.553,15.621 99.855,15.69 76.2,16.51 71.501,16.891 91.821,17.145 106.71,17.312 102.997,17.739 75.057,17.907 77.851,17.907 73.279,18.161 109.474,18.161 100.33,19.136 106.553,19.177 103.124,20.574 92.583,20.828 109.474,20.955 106.66,21.401 100.203,21.463 87.884,22.225 95.758,23.581 94.658,24.681 95.758,24.681 96.858,24.681 75.057,25.146 76.708,25.146 95.758,25.781 103.124,28.194 109.601,28.575 103.124,29.337 99.314,29.718 109.601,31.115 74.93,32.258 73.279,32.512 71.501,32.635 76.962,32.762 88.138,33.147 102.743,33.147 80.264,33.782 71.501,34.163 81.788,34.29 99.187,34.29 85.09,35.56 72.771,35.687 75.311,35.687 102.235,36.195 71.12,37.338 75.946,37.973 99.187,38.227 83.566,40.386 86.614,40.386 88.773,40.386 94.996,41.529 91.313,41.656 89.154,41.783 70.358,41.91 94.361,43.688 102.362,44.323 87.122,44.704 83.82,45.974 79.883,46.482 70.358,47.498 99.187,47.752
  other v2: 94.14,22.97 95.24,22.97 96.34,22.97 97.44,22.97 97.44,24.07 94.14,25.17 96.34,25.17 97.44,25.17 94.14,26.27 95.24,26.27 96.34,26.27 97.44,26.27
IRQ: J2.1 U1.25 | length 40
  Top Layer w0.25: J2.1 101.473,41.656 101.473,40.132 v1(106.426,35.179) ; U1.25 105.043,24.37 v1(106.299,23.114)
  Bottom Layer w0.25: v1(106.299,23.114) 106.425,22.988 107.102,22.988 107.104,22.987 107.442,22.987 108.204,23.749 108.204,33.401 v1(106.426,35.179)
MISO: J1.3 U1.29 | length 15.8
  Top Layer w0.3: U1.29 113.748,26.37 114.083,26.035 J1.3
MOSI: J1.4 P1.3 U1.28 | length 74.9
  Top Layer w0.3: U1.28 112.032,25.87 112.042,25.88 J1.4
  Bottom Layer w0.3: P1.3 78.867,1.143 107.696,1.143 116.078,9.525 116.078,21.844 J1.4
NetC4_2: C4.2 U1.14 Y1.1 | length 10.2
  Top Layer w0.3: C4.2 94.031,14.815 Y1.1 94.352,14.619 95.377,15.644 95.377,17.907 95.04,18.244 U1.14
NetC5_2: C5.2 U1.15 Y1.3 | length 7.4
  Top Layer w0.3: U1.15 95.54,19.141 96.527,18.154 Y1.3 96.731,16.165 C5.2
NetC9_1: C9.1 U1.37 | length 10.2
  Top Layer w0.3: U1.37 95.04,34.08 96.774,35.814 C9.1
NetC11_1: C11.1 R3.1 | length 2.8
  Top Layer w0.45: R3.1 81.534,12.7 81.85,12.384 C11.1
NetC14_1: C14.1 C15.1 C18.2 L1.2 TP3.1 | length 12.9
  Top Layer w0.8: C15.1 C14.1 77.337,27.111 79.238,27.111 C18.2 79.34,27.209 80.151,27.209 81.372,28.43 TP3.1 83.203,28.43 85.344,26.289 L1.2
NetC14_2: C14.2 C15.2 C16.2 C17.2 R5.2 | length 9.2
  Top Layer w0.45: C17.2@71.253,28.511 C16.2@73.277,28.511 ; C16.2 C15.2 C14.2
  Top Layer w0.9: R5.2 69.215,27.3 69.215,27.94 69.85,28.575 71.185,28.575 C17.2 C17.2@71.253,28.511 ; C16.2@73.277,28.511 C16.2
NetC19_1: C19.1 C22.2 C23.2 L2.2 R3.2 TP2.1 TP8.1 | length 17.7
  Top Layer w0.4: R3.2 TP2.1 TP8.1
  Top Layer w0.8: C23.2 C22.2 C19.1 79.34,23.21 80.386,23.21 81.372,22.224 TP8.1 83.819,22.224 85.09,23.495 L2.2
NetC20_1: C20.1 C21.1 C22.1 C23.1 R8.1 | length 9.3
  Top Layer w0.45: C21.1 C20.1 C23.1 C22.1
  Top Layer w0.9: R8.1 69.215,23.373 69.215,22.606 69.811,22.01 71.151,22.01 C21.1
NetDS1_2: DS1.2 R1.2 | length 4.3
  Top Layer w0.4: DS1.2 73.58,43.26 74.295,42.545 74.295,41.317 R1.2
NetJ6_1: J6.1 R5.1 R6.2 | length 380.6
  Top Layer w0.356: 65.278,23.33 R6.2 65.278,5.842 64.77,5.334 14.224,5.334 13.462,6.096 13.462,24.638 12.446,25.654 12.446,45.212 13.462,46.228 65.024,46.228 66.294,44.958 66.294,26.162 67.31,25.146 67.31,4.064 66.548,3.302 12.446,3.302 11.43,4.318 11.43,24.638 10.414,25.654 10.414,46.228 12.446,48.26 66.548,48.26 68.334,46.474 68.334,33.002 J6.1 ; R5.1 R5.1@69.223,30.358
  Top Layer w0.9: R5.1@69.223,30.358 J6.1
NetJ8_1: J8.1 R7.1 R8.2 | length 378.5
  Top Layer w0.356: v1(10.414,24.13) 10.414,3.81 11.938,2.286 67.056,2.286 68.334,3.564 68.334,17.652 J8.1 ; v1(11.43,26.162) 11.43,45.72 12.954,47.244 65.786,47.244 67.31,45.72 v1(67.31,26.543) ; v1(12.446,24.13) 12.446,5.08 13.208,4.318 65.786,4.318 66.294,4.826 v1(66.294,24.765) ; v1(13.462,26.162) 13.462,44.45 14.224,45.212 64.516,45.212 65.278,44.45 R7.1 65.278,29.199 ; R8.2 R8.2@69.223,20.315
  Top Layer w0.9: J8.1 R8.2@69.223,20.315
  Bottom Layer w0.406: v1(10.414,24.13) v1(11.43,26.162) ; v1(12.446,24.13) v1(13.462,26.162) ; v1(66.294,24.765) v1(67.31,26.543)
NetL1_1: L1.1 U1.4 | length 5.2
  Top Layer w0.3: L1.1 90.17,26.289 91.089,25.37 U1.4
NetL2_1: L2.1 U1.6 | length 5.2
  Top Layer w0.3: L2.1 90.17,23.495 91.045,24.37 U1.6
NSS: J1.5 P1.2 U1.27 | length 67.9
  Top Layer w0.3: U1.27 105.114,25.37 105.124,25.38 110.002,25.38 J1.5
  Bottom Layer w0.3: P1.2 79.375,3.048 80.518,1.905 107.061,1.905 112.776,7.62 112.776,19.304 J1.5
RSTOUTN: J2.2 U1.26 | length 38.6
  Top Layer w0.3: J2.2 92.583,47.879 v1(106.426,34.036) ; U1.26 105.791,24.87 v1(106.277,24.384)
  Bottom Layer w0.3: v1(106.277,24.384) 107.188,24.384 107.569,24.765 107.569,32.893 v1(106.426,34.036)
RSTPDN: J2.3 R2.1 U1.38 | length 36.8
  Top Layer w0.3: R2.1 81.1,38.555 81.407,38.862 v1(82.042,38.862) ; v1(93.98,38.862) 93.98,38.705 94.54,38.145 U1.38
  Bottom Layer w0.3: v1(82.042,38.862) v1(93.98,38.862) 93.98,40.591 90.043,44.528 J2.3
RX: C11.2 R4.1 U1.10 | length 17.8
  Top Layer w0.3: R4.1@84.143,13.462 R4.1 84.203,13.522 84.203,13.97 84.965,14.732 88.265,14.732 91.44,17.907 91.44,21.717 92.093,22.37 U1.10
  Top Layer w0.45: C11.2 83.25,13.146 83.566,13.462 R4.1@84.143,13.462
S0: J3.2 U1.16 | length 19.1
  Top Layer w0.3: J3.2 93.091,9.398 94.615,10.922 v1(97.028,10.922) ; U1.16 96.04,20.165 v1(97.028,19.177)
  Bottom Layer w0.3: v1(97.028,10.922) v1(97.028,19.177)
S1: J4.2 U1.17 | length 19.8
  Top Layer w0.3: U1.17 96.54,20.935 v1(98.298,19.177) ; v1(98.298,10.922) 100.965,10.922 102.616,9.271 J4.2
  Bottom Layer w0.3: v1(98.298,10.922) v1(98.298,19.177)
SCK: J1.2 U1.30 | length 16.4
  Top Layer w0.3: U1.30 112.722,26.87 J1.2
TVDD: C2.2 C3.1 FB1.2 U1.5 | length 16.5
  Top Layer w0.3: C3.1 86.869,32.034 87.597,31.307 C2.2 88.777,32.262 v1(89.281,32.766) 89.223,32.824 89.223,34.232 FB1.2 ; v1(89.789,25.4) 89.953,25.4 90.483,24.87 U1.5
  Bottom Layer w0.3: v1(89.281,32.766) 89.281,32.602 89.789,32.094 v1(89.789,25.4)
VCC: C1.2 C7.2 FB1.1 FB2.1 U1.39 | length 35.4
  Top Layer w0.3: C7.2@91.251,33.528 93.599,33.528 94.04,33.087 U1.39
  Top Layer w0.4: v1(82.296,32.131) 82.296,33.147 82.869,33.72 C1.2 85.536,33.72 86.106,34.29 FB1.1 87.365,35.422 87.884,35.941 90.297,35.941 91.242,34.996 C7.2 C7.2@91.251,33.528 ; FB2.1 v1(84.963,21.79)
  Bottom Layer w0.4: v1(82.296,32.131) 83.566,32.131 84.963,30.734 v1(84.963,21.79)
VDD: C6.2 C8.2 C25.1 DS1.1 J1.1 J3.3 J4.3 R2.2 U1.23 U1.40 U2.5 | length 111
  Top Layer w0.3: C6.2 93.345,29.718 93.54,29.523 U1.40 ; v1@92.837,32.221 v1(92.837,32.385) ; U1.23 98.766,23.369 v1(101.473,23.368) v1(101.473,23.368) 103.062,23.368 C8.2
  Top Layer w0.7: DS1.1 76.407,45.085 77.216,45.085 79.121,43.18 79.121,35.814 79.629,35.306 82.169,35.306 82.931,36.068 82.931,36.969 R2.2 92.54,37 92.837,36.703 v1(92.837,35.687) ; C6.2 92.521,31.905 v1@92.837,32.221 ; v1(101.473,30.734) 104.902,30.734 108.519,34.351 U2.5 110.938,37.054 C25.1 110.968,34.574 J1.1
  Bottom Layer w0.7: J3.3 90.551,7.747 90.548,7.75 91.435,8.636 98.806,8.636 100.076,7.366 J4.3 101.473,7.366 v1(101.473,23.368) v1(101.473,30.734) 101.473,31.877 100.965,32.385 v1(92.837,32.385) v1(92.837,35.687)
Vin: C24.1 J5.1 P1.1 U2.1 U2.3 | length 78.3
  Top Layer w0.4: U2.3 106.619,40.533 106.853,40.767 108.204,40.767 ; v1(109.601,41.91) 108.458,40.767 108.204,40.767 ; C24.1 110.938,39.654 U2.1 108.458,39.715 108.458,40.513 108.204,40.767 ; v1(111.76,14.732) 112.538,13.954 J5.1
  Bottom Layer w0.4: P1.1 106.934,3.175 111.76,8.001 v1(111.76,14.732) 111.76,40.894 110.744,41.91 v1(109.601,41.91)
VMID: C10.2 R4.2 U1.9 | length 20.7
  Top Layer w0.3: R4.2@85.515,13.468 v1@87.497,13.468 ; v1(87.503,17.018) 85.852,17.018 85.598,16.764 85.598,16.072 C10.2 88.769,16.006 90.932,18.169 90.932,21.902 91.9,22.87 U1.9
  Top Layer w0.4: R4.2 R4.2@85.515,13.468 ; v1@87.497,13.468 v1(87.503,13.462)
  Bottom Layer w0.3: v1(87.503,13.462) v1(87.503,17.018)
pads on no net: U1.2 U1.19 U1.20 U1.21 U1.22 U1.24 U1.31 U1.32 U1.33 U1.34 U1.35 U1.36 U2.4

## Polygon pours and split planes (outlines as drawn)
GND on Top Layer "GND_L01_P002" (solid, remove dead copper, pour order 2): 80.137,50.038 80.137,29.083 85.344,29.083 85.344,13.843 80.137,13.843 80.137,0.762 106.553,0.762 106.553,50.038
GND on Top Layer "GND" (solid, remove dead copper, pour order 1): 69.85,50.038 80.137,50.038 80.137,0.762 69.85,0.762
GND on Top Layer "GND_L01_P004" (solid, remove dead copper, pour order 4): 106.553,50.038 106.553,0.762 115.189,0.762 116.459,2.032 116.459,48.26 115.189,50.038
GND on Bottom Layer "GND_L02_P005" (solid, remove dead copper, pour order 5): 9.144,49.53 9.144,1.27 115.189,1.27 116.459,2.54 116.459,48.768 115.189,49.53 114.681,49.53

## Keep-outs
Bottom Layer:
  region: 14.732,43.763 15.24,44.271 63.5,44.271 64.008,43.763 64.008,7.187 63.5,6.425 15.24,6.425 14.732,6.933
  region: 9.144,22.098 9.144,23.368 14.224,23.368 14.224,22.098
  region: 9.144,26.924 9.144,28.194 14.224,28.194 14.224,26.924

## Silkscreen, mask and mechanical layers (free items; w line width, h text height)
Top Overlay:
  drawing of 11 lines, arcs and shapes, not listed
  text "IRQ" at 95.558,44.269 h0.8 r90
  text "GND" at 82.858,44.142 h0.8 r90
  text "AUX1" at 87.938,43.634 h0.8 r90
  text "AUX2" at 85.398,43.38 h0.8 r90
  text "RSTPDN" at 90.478,41.729 h0.8 r90
  text "RSTOUTN" at 93.018,40.84 h0.8 r90
  text "VDD" at 109.959,30.68 h0.8
  text "SCK" at 109.959,28.267 h0.8
  text "MISO" at 109.293,25.6 h0.8
  text "MOSI" at 109.426,23.187 h0.8
  text "NSS" at 109.959,20.647 h0.8
  text "GND" at 109.959,17.98 h0.8
  text "Vin" at 110.093,13.027 h0.8
  text "GND" at 109.959,10.868 h0.8
  text "OFF" at 93.164,7.693 h1
  text "OFF" at 102.689,7.566 h1
  text "GND" at 74.603,4.899 h0.8 r90
  text "MOSI" at 77.143,4.899 h0.8 r90
  text "NSS" at 79.81,4.899 h0.8 r90
  text "Vin" at 82.477,4.899 h0.8 r90
  text "ON" at 90.624,3.375 h1
  text "ON" at 100.276,3.375 h1
  text "S0" at 92.529,1.597 h1
  text "S1" at 102.181,1.597 h1
Board Shape:
  lines w0.5: 0,2.667 ccw(c2.667,2.667) 2.667,0 4.191,0 114.427,0 ccw(c114.427,2.667) 117.094,2.667 117.094,48.387 ccw(c114.427,48.387) 114.427,51.054 3.556,51.054 2.667,51.054 ccw(c2.667,48.387) 0,48.387 0,47.498 0,4.191 0,2.667